# EAGLE board USBSolder (EAGLE 7.1.0)
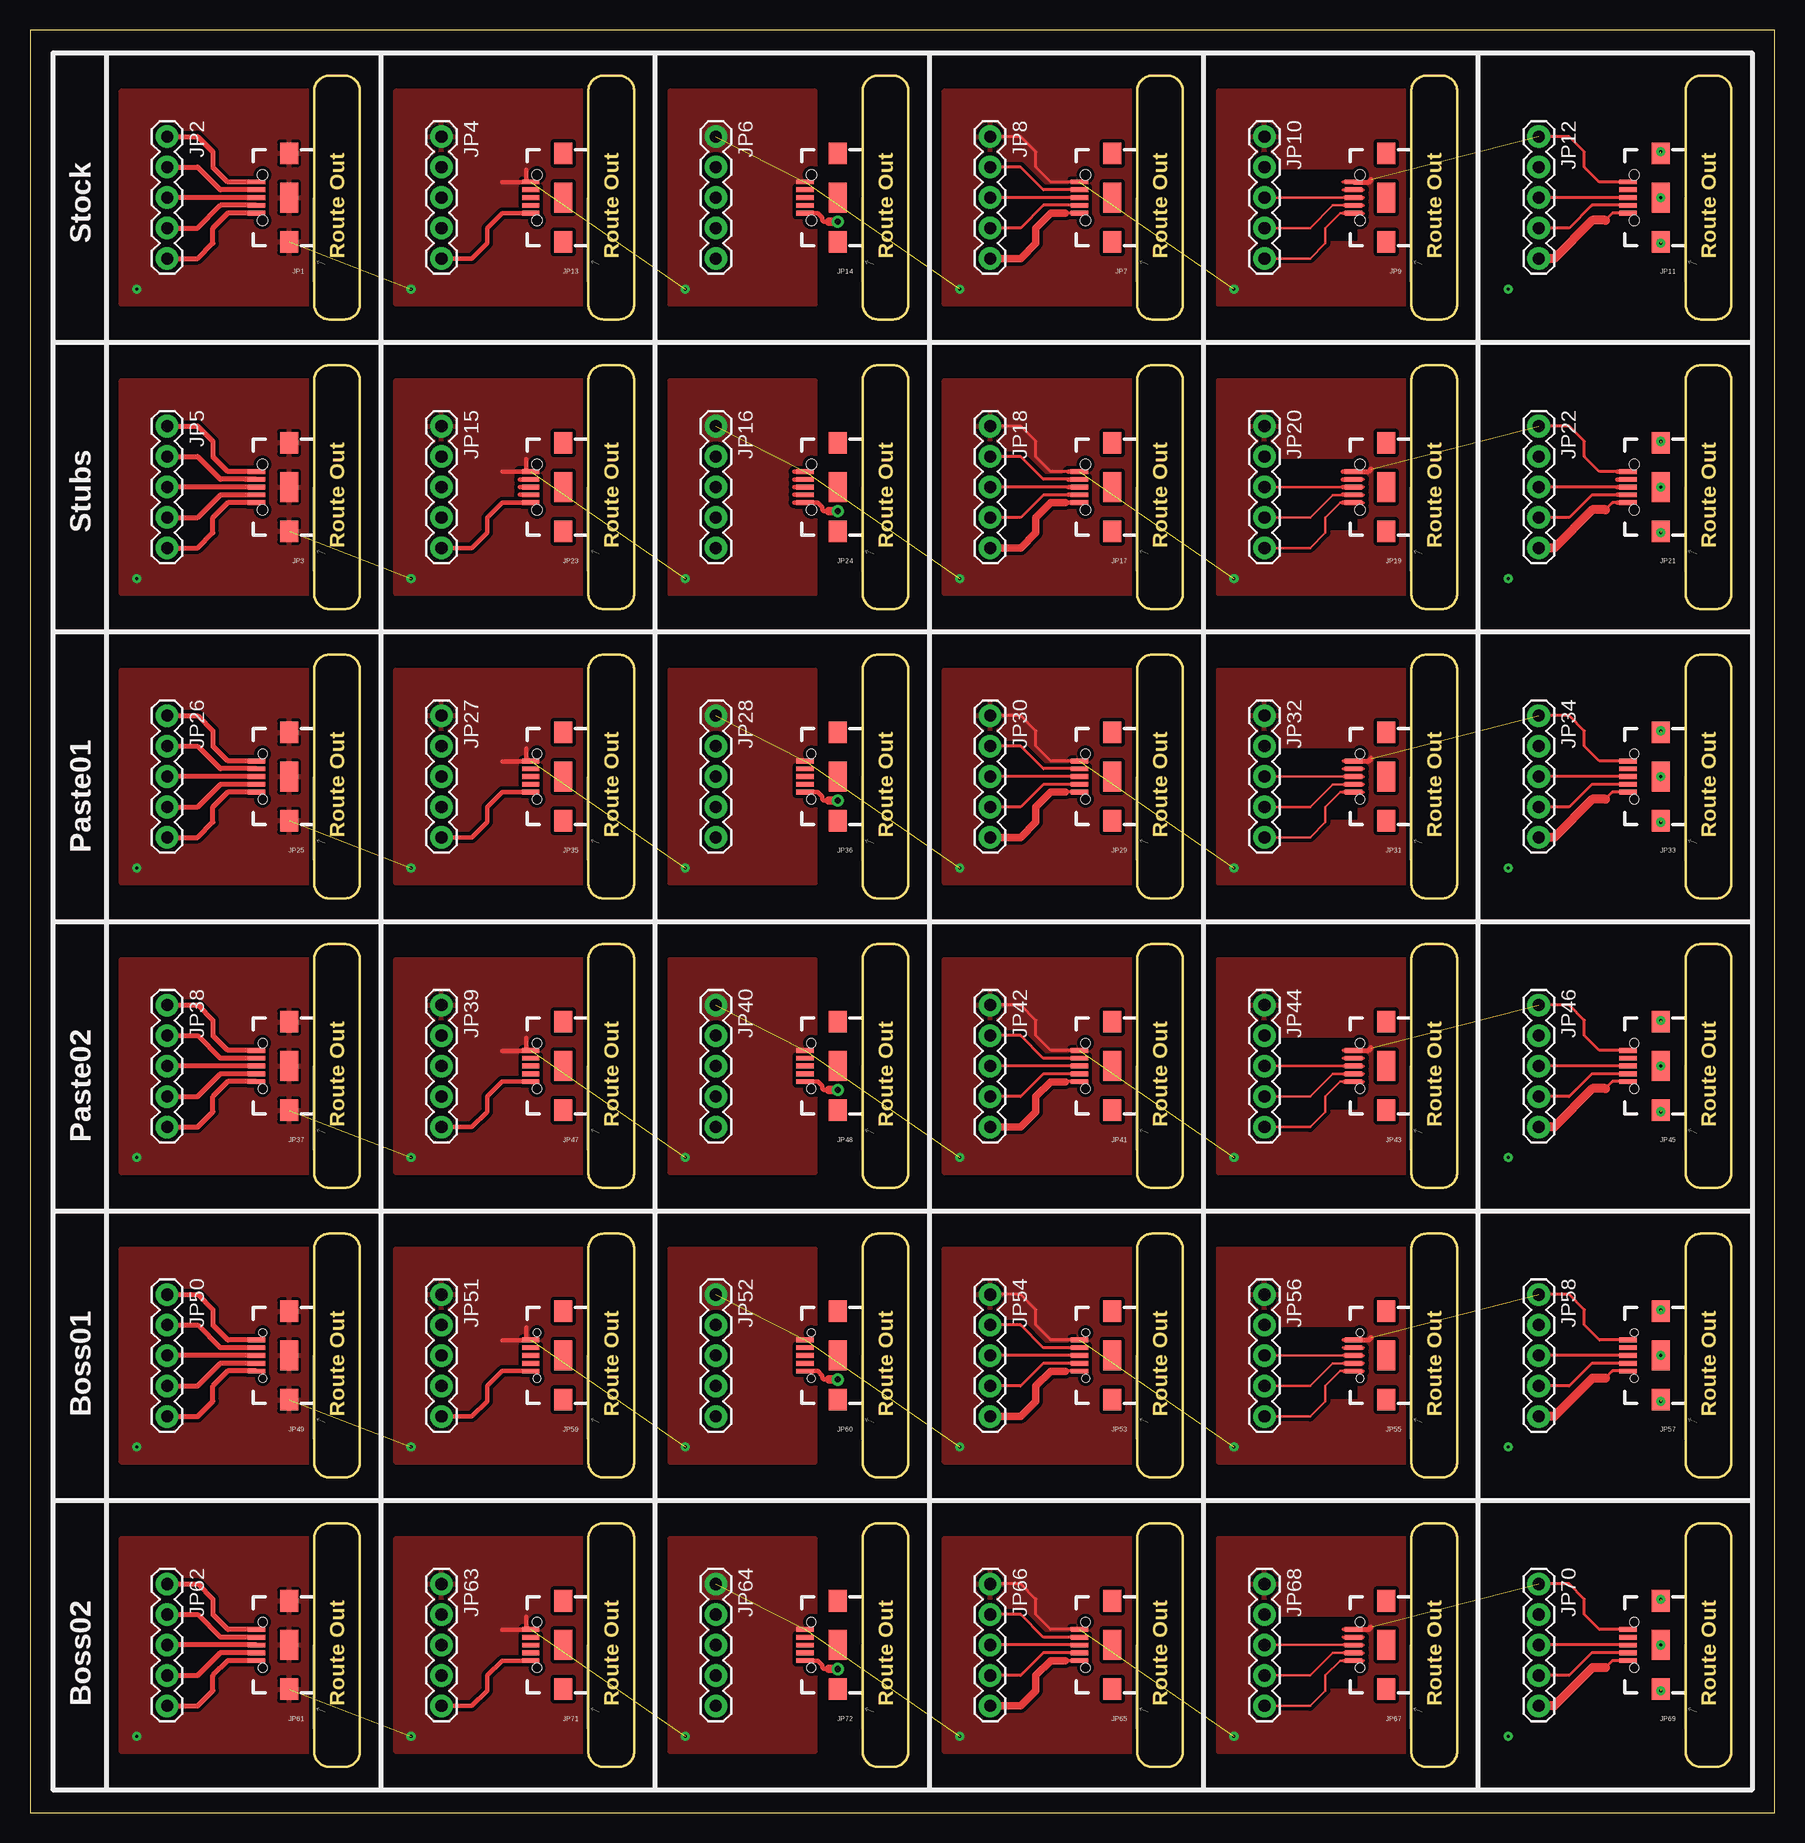
[diagram p0: board, top side]
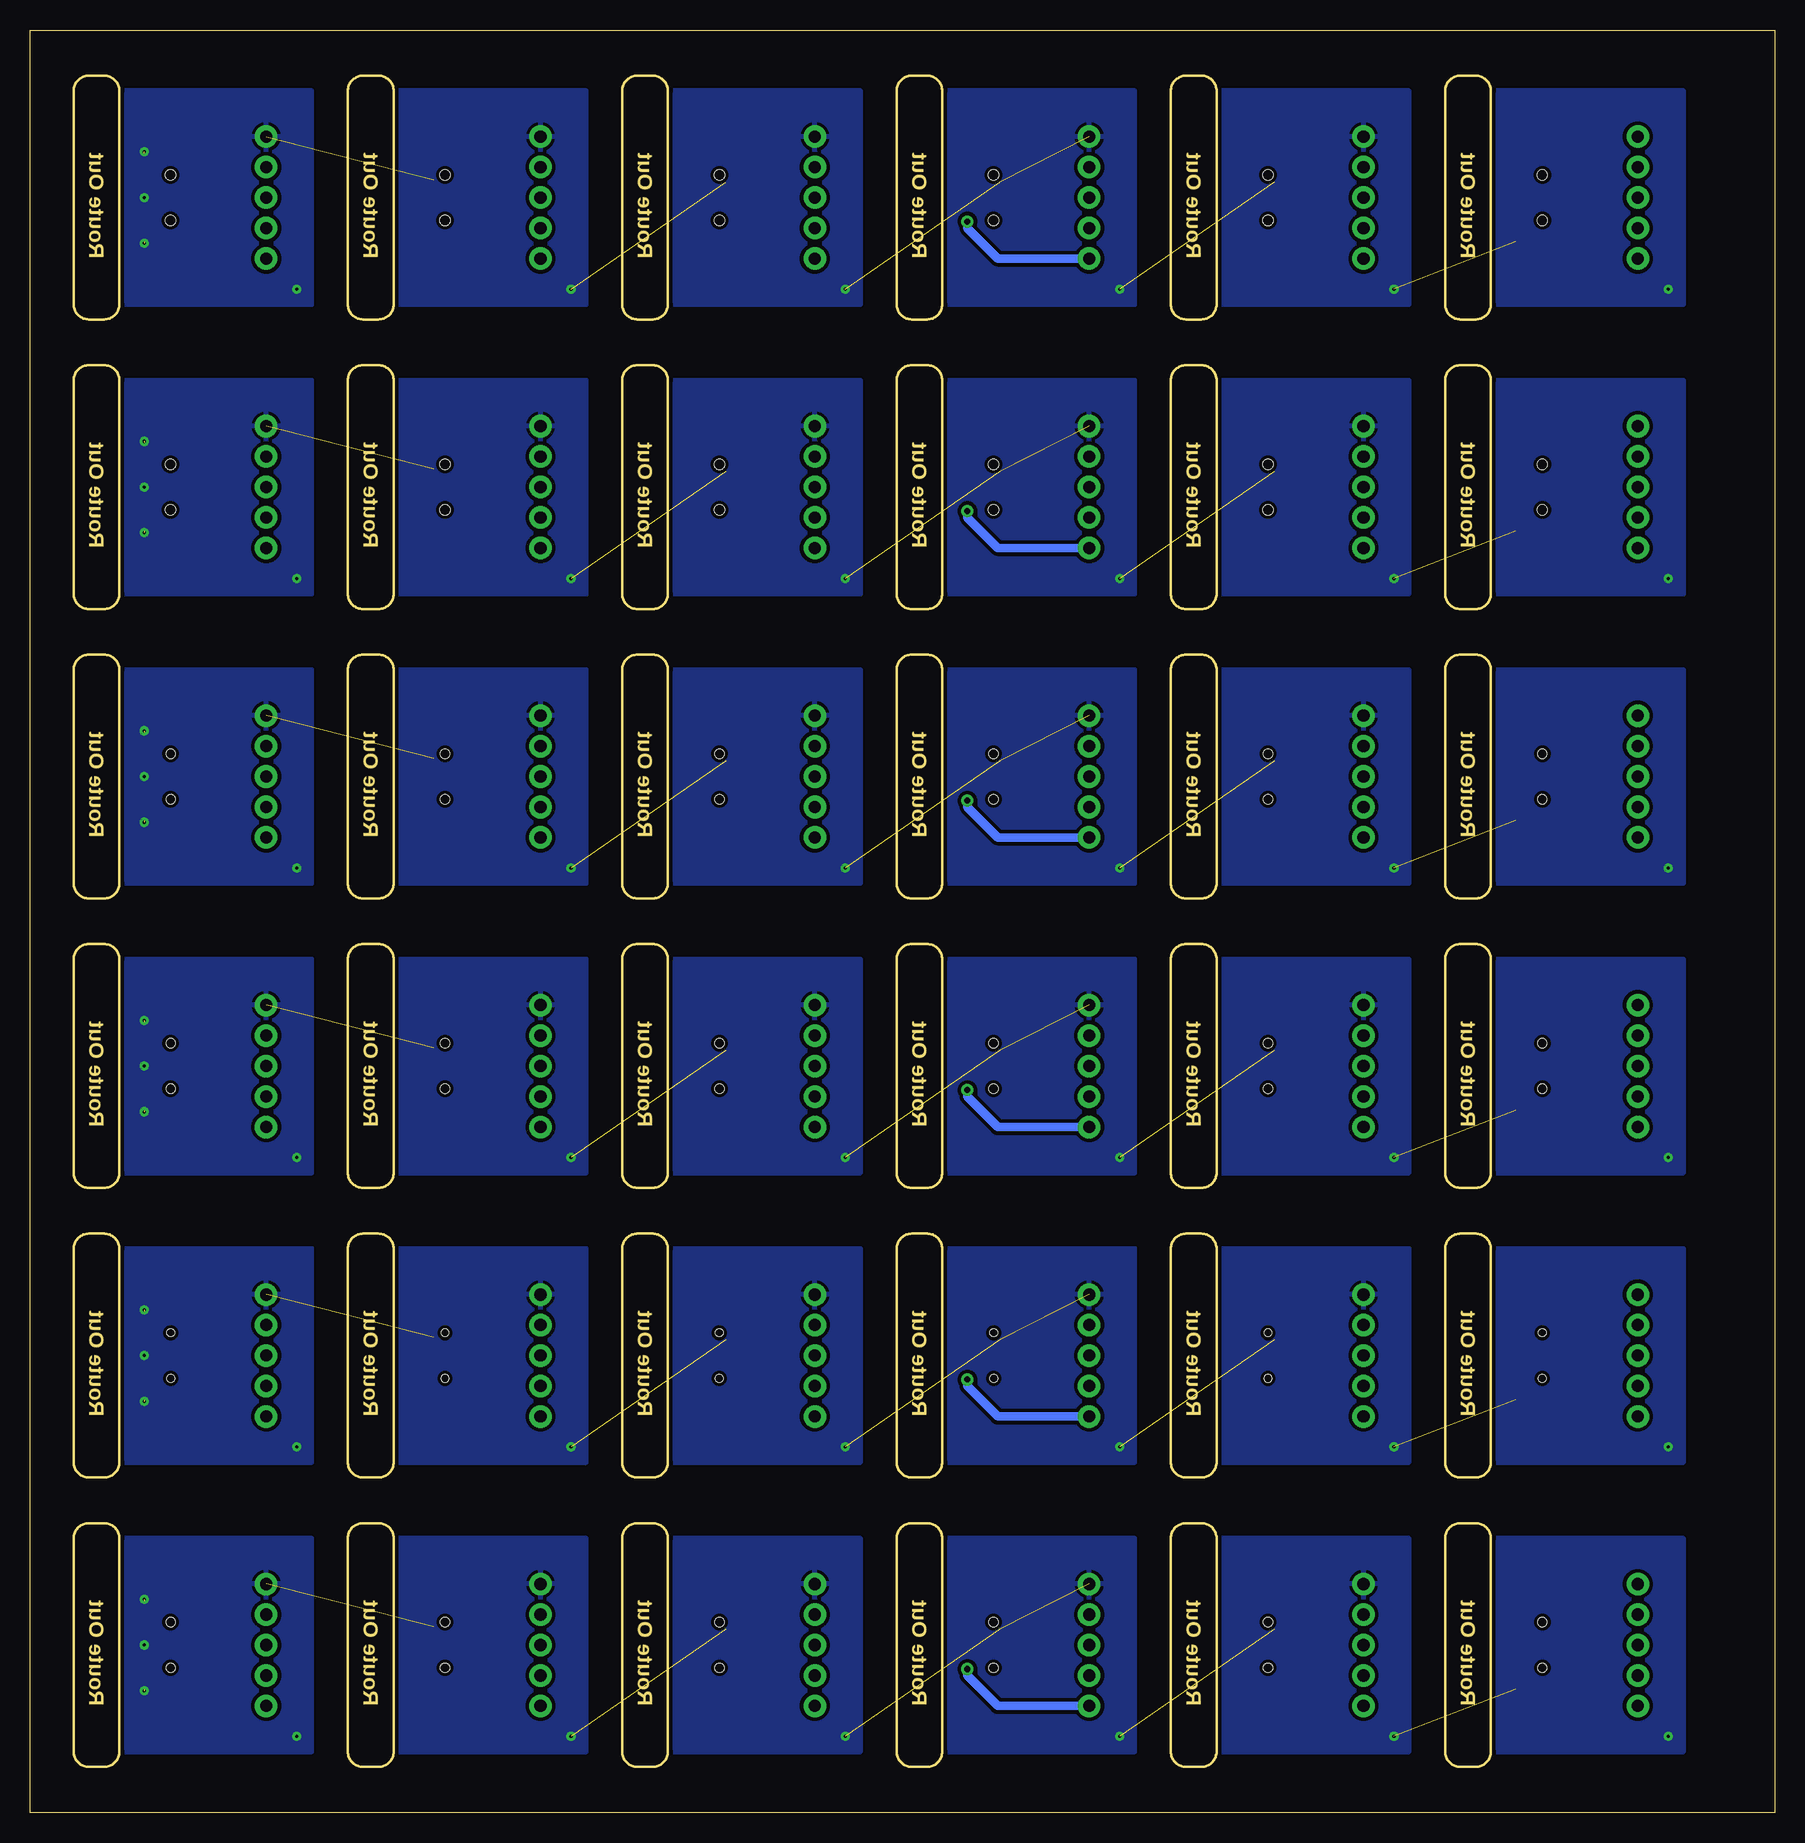
[diagram p1: board, bottom side, seen from below]

Size 145.41 x 148.59 mm. Coordinates in mm from the lower left corner, seen from the top.
Outline: 0,0 145.41,0 145.41,148.59 0,148.59 0,0
Outline: 23.67,125.73 23.67,143.51 arc-90 24.94,144.78 26.21,144.78 arc-90 27.48,143.51 27.48,125.73 arc-90 26.21,124.46 24.94,124.46 arc-90 23.67,125.73
Outline: 46.53,125.73 46.53,143.51 arc-90 47.8,144.78 49.07,144.78 arc-90 50.34,143.51 50.34,125.73 arc-90 49.07,124.46 47.8,124.46 arc-90 46.53,125.73
Outline: 69.39,125.73 69.39,143.51 arc-90 70.66,144.78 71.93,144.78 arc-90 73.2,143.51 73.2,125.73 arc-90 71.93,124.46 70.66,124.46 arc-90 69.39,125.73
Outline: 92.25,125.73 92.25,143.51 arc-90 93.52,144.78 94.79,144.78 arc-90 96.06,143.51 96.06,125.73 arc-90 94.79,124.46 93.52,124.46 arc-90 92.25,125.73
Outline: 115.11,125.73 115.11,143.51 arc-90 116.38,144.78 117.65,144.78 arc-90 118.92,143.51 118.92,125.73 arc-90 117.65,124.46 116.38,124.46 arc-90 115.11,125.73
Outline: 137.97,125.73 137.97,143.51 arc-90 139.24,144.78 140.51,144.78 arc-90 141.78,143.51 141.78,125.73 arc-90 140.51,124.46 139.24,124.46 arc-90 137.97,125.73
Outline: 23.67,101.6 23.67,119.38 arc-90 24.94,120.65 26.21,120.65 arc-90 27.48,119.38 27.48,101.6 arc-90 26.21,100.33 24.94,100.33 arc-90 23.67,101.6
Outline: 46.53,101.6 46.53,119.38 arc-90 47.8,120.65 49.07,120.65 arc-90 50.34,119.38 50.34,101.6 arc-90 49.07,100.33 47.8,100.33 arc-90 46.53,101.6
Outline: 69.39,101.6 69.39,119.38 arc-90 70.66,120.65 71.93,120.65 arc-90 73.2,119.38 73.2,101.6 arc-90 71.93,100.33 70.66,100.33 arc-90 69.39,101.6
Outline: 92.25,101.6 92.25,119.38 arc-90 93.52,120.65 94.79,120.65 arc-90 96.06,119.38 96.06,101.6 arc-90 94.79,100.33 93.52,100.33 arc-90 92.25,101.6
Outline: 115.11,101.6 115.11,119.38 arc-90 116.38,120.65 117.65,120.65 arc-90 118.92,119.38 118.92,101.6 arc-90 117.65,100.33 116.38,100.33 arc-90 115.11,101.6
Outline: 137.97,101.6 137.97,119.38 arc-90 139.24,120.65 140.51,120.65 arc-90 141.78,119.38 141.78,101.6 arc-90 140.51,100.33 139.24,100.33 arc-90 137.97,101.6
Outline: 23.67,77.47 23.67,95.25 arc-90 24.94,96.52 26.21,96.52 arc-90 27.48,95.25 27.48,77.47 arc-90 26.21,76.2 24.94,76.2 arc-90 23.67,77.47
Outline: 46.53,77.47 46.53,95.25 arc-90 47.8,96.52 49.07,96.52 arc-90 50.34,95.25 50.34,77.47 arc-90 49.07,76.2 47.8,76.2 arc-90 46.53,77.47
Outline: 69.39,77.47 69.39,95.25 arc-90 70.66,96.52 71.93,96.52 arc-90 73.2,95.25 73.2,77.47 arc-90 71.93,76.2 70.66,76.2 arc-90 69.39,77.47
Outline: 92.25,77.47 92.25,95.25 arc-90 93.52,96.52 94.79,96.52 arc-90 96.06,95.25 96.06,77.47 arc-90 94.79,76.2 93.52,76.2 arc-90 92.25,77.47
Outline: 115.11,77.47 115.11,95.25 arc-90 116.38,96.52 117.65,96.52 arc-90 118.92,95.25 118.92,77.47 arc-90 117.65,76.2 116.38,76.2 arc-90 115.11,77.47
Outline: 137.97,77.47 137.97,95.25 arc-90 139.24,96.52 140.51,96.52 arc-90 141.78,95.25 141.78,77.47 arc-90 140.51,76.2 139.24,76.2 arc-90 137.97,77.47
Outline: 23.67,53.34 23.67,71.12 arc-90 24.94,72.39 26.21,72.39 arc-90 27.48,71.12 27.48,53.34 arc-90 26.21,52.07 24.94,52.07 arc-90 23.67,53.34
Outline: 46.53,53.34 46.53,71.12 arc-90 47.8,72.39 49.07,72.39 arc-90 50.34,71.12 50.34,53.34 arc-90 49.07,52.07 47.8,52.07 arc-90 46.53,53.34
Outline: 69.39,53.34 69.39,71.12 arc-90 70.66,72.39 71.93,72.39 arc-90 73.2,71.12 73.2,53.34 arc-90 71.93,52.07 70.66,52.07 arc-90 69.39,53.34
Outline: 92.25,53.34 92.25,71.12 arc-90 93.52,72.39 94.79,72.39 arc-90 96.06,71.12 96.06,53.34 arc-90 94.79,52.07 93.52,52.07 arc-90 92.25,53.34
Outline: 115.11,53.34 115.11,71.12 arc-90 116.38,72.39 117.65,72.39 arc-90 118.92,71.12 118.92,53.34 arc-90 117.65,52.07 116.38,52.07 arc-90 115.11,53.34
Outline: 137.97,53.34 137.97,71.12 arc-90 139.24,72.39 140.51,72.39 arc-90 141.78,71.12 141.78,53.34 arc-90 140.51,52.07 139.24,52.07 arc-90 137.97,53.34
Outline: 23.67,29.21 23.67,46.99 arc-90 24.94,48.26 26.21,48.26 arc-90 27.48,46.99 27.48,29.21 arc-90 26.21,27.94 24.94,27.94 arc-90 23.67,29.21
Outline: 46.53,29.21 46.53,46.99 arc-90 47.8,48.26 49.07,48.26 arc-90 50.34,46.99 50.34,29.21 arc-90 49.07,27.94 47.8,27.94 arc-90 46.53,29.21
Outline: 69.39,29.21 69.39,46.99 arc-90 70.66,48.26 71.93,48.26 arc-90 73.2,46.99 73.2,29.21 arc-90 71.93,27.94 70.66,27.94 arc-90 69.39,29.21
Outline: 92.25,29.21 92.25,46.99 arc-90 93.52,48.26 94.79,48.26 arc-90 96.06,46.99 96.06,29.21 arc-90 94.79,27.94 93.52,27.94 arc-90 92.25,29.21
Outline: 115.11,29.21 115.11,46.99 arc-90 116.38,48.26 117.65,48.26 arc-90 118.92,46.99 118.92,29.21 arc-90 117.65,27.94 116.38,27.94 arc-90 115.11,29.21
Outline: 137.97,29.21 137.97,46.99 arc-90 139.24,48.26 140.51,48.26 arc-90 141.78,46.99 141.78,29.21 arc-90 140.51,27.94 139.24,27.94 arc-90 137.97,29.21
Outline: 23.67,5.08 23.67,22.86 arc-90 24.94,24.13 26.21,24.13 arc-90 27.48,22.86 27.48,5.08 arc-90 26.21,3.81 24.94,3.81 arc-90 23.67,5.08
Outline: 46.53,5.08 46.53,22.86 arc-90 47.8,24.13 49.07,24.13 arc-90 50.34,22.86 50.34,5.08 arc-90 49.07,3.81 47.8,3.81 arc-90 46.53,5.08
Outline: 69.39,5.08 69.39,22.86 arc-90 70.66,24.13 71.93,24.13 arc-90 73.2,22.86 73.2,5.08 arc-90 71.93,3.81 70.66,3.81 arc-90 69.39,5.08
Outline: 92.25,5.08 92.25,22.86 arc-90 93.52,24.13 94.79,24.13 arc-90 96.06,22.86 96.06,5.08 arc-90 94.79,3.81 93.52,3.81 arc-90 92.25,5.08
Outline: 115.11,5.08 115.11,22.86 arc-90 116.38,24.13 117.65,24.13 arc-90 118.92,22.86 118.92,5.08 arc-90 117.65,3.81 116.38,3.81 arc-90 115.11,5.08
Outline: 137.97,5.08 137.97,22.86 arc-90 139.24,24.13 140.51,24.13 arc-90 141.78,22.86 141.78,5.08 arc-90 140.51,3.81 139.24,3.81 arc-90 137.97,5.08
Copper layers (1*16): Top 0.035mm / dielectric 1.5mm / Bottom 0.035mm
Design rules "SparkFun-2-layer": minimum track width 7mil, minimum drill 15mil, track to track 8mil, track to pad 8mil, pad to pad 8mil, via to via 8mil, smd to smd 8mil, copper to edge 8mil, drill to drill 8mil, minimum pad ring 12mil, minimum via ring 10mil, stop-mask expansion 4mil, vias tented up to drill 20mil, thermal gap 10mil

## Footprints (pad centres in the part's own frame; a part is rotated, then mirrored left to right if it is on the bottom)
USB-B-MICRO-SMD_V03 = smd 1.45 x 0.4: D+1 2.725,0; D-1 2.725,0.65; GND1 2.725,-1.3; ID1 2.725,-0.65; VBUS1 2.725,1.3 | smd 1.5 x 1.8: SHIELD1 0,3.685; SHIELD2 0,-3.685 | smd 1.5 x 2.5: SHIELD3 0,0 | hole 0.85: 2.2,1.9; 2.2,-1.9
1X05 = drill 1.016 pad 1.88: 1 0,0; 2 2.54,0; 3 5.08,0; 4 7.62,0; 5 10.16,0
USB-MICRO-STUBS-01 = smd 1.45 x 0.4: D+1 2.725,0; D-1 2.725,0.65; GND1 2.725,-1.3; ID1 2.725,-0.65; VBUS1 2.725,1.3 | smd 1.5 x 1.8: SHIELD1 0,3.685; SHIELD2 0,-3.685 | smd 1.5 x 2.5: SHIELD3 0,0 | hole 0.85: 2.2,1.9; 2.2,-1.9
USB-MICRO-PASTE-01 = smd 1.45 x 0.4: D+1 2.725,0; D-1 2.725,0.65; GND1 2.725,-1.3; ID1 2.725,-0.65; VBUS1 2.725,1.3 | smd 1.5 x 1.8: SHIELD1 0,3.685; SHIELD2 0,-3.685 | smd 1.5 x 2.5: SHIELD3 0,0 | hole 0.762: 2.2,1.9; 2.2,-1.9
USB-MICRO-PASTE-02 = smd 1.45 x 0.4: D+1 2.725,0; D-1 2.725,0.65; GND1 2.725,-1.3; ID1 2.725,-0.65; VBUS1 2.725,1.3 | smd 1.5 x 1.8: SHIELD1 0,3.685; SHIELD2 0,-3.685 | smd 1.5 x 2.5: SHIELD3 0,0 | hole 0.762: 2.2,1.9; 2.2,-1.9
USB-MICRO-BOSS-01 = smd 1.45 x 0.4: D+1 2.725,0; D-1 2.725,0.65; GND1 2.725,-1.3; ID1 2.725,-0.65; VBUS1 2.725,1.3 | smd 1.5 x 1.8: SHIELD1 0,3.685; SHIELD2 0,-3.685 | smd 1.5 x 2.5: SHIELD3 0,0 | hole 0.635: 2.2,1.9; 2.2,-1.9
USB-MICRO-BOSS-02 = smd 1.45 x 0.4: D+1 2.725,0; D-1 2.725,0.65; GND1 2.725,-1.3; ID1 2.725,-0.65; VBUS1 2.725,1.3 | smd 1.5 x 1.8: SHIELD1 0,3.685; SHIELD2 0,-3.685 | smd 1.5 x 2.5: SHIELD3 0,0 | hole 0.762: 2.2,1.9; 2.2,-1.9

## Placement (x,y rotation side)
FRAME1  FRAME-LETTER  [CREATIVE_COMMONS]  48.26,-17.78 0 top  (outside the outline)
JP1  [USB-B-MICRO-SMD_V03]  21.59,134.62 180 top
JP2  [1X05]  11.43,139.7 270 top
JP3  [USB-MICRO-STUBS-01]  21.59,110.49 180 top
JP4  [1X05]  34.29,139.7 270 top
JP5  [1X05]  11.43,115.57 270 top
JP6  [1X05]  57.15,139.7 270 top
JP7  [USB-B-MICRO-SMD_V03]  90.17,134.62 180 top
JP8  [1X05]  80.01,139.7 270 top
JP9  [USB-B-MICRO-SMD_V03]  113.03,134.62 180 top
JP10  [1X05]  102.87,139.7 270 top
JP11  [USB-B-MICRO-SMD_V03]  135.89,134.62 180 top
JP12  [1X05]  125.73,139.7 270 top
JP13  [USB-B-MICRO-SMD_V03]  44.45,134.62 180 top
JP14  [USB-B-MICRO-SMD_V03]  67.31,134.62 180 top
JP15  [1X05]  34.29,115.57 270 top
JP16  [1X05]  57.15,115.57 270 top
JP17  [USB-MICRO-STUBS-01]  90.17,110.49 180 top
JP18  [1X05]  80.01,115.57 270 top
JP19  [USB-MICRO-STUBS-01]  113.03,110.49 180 top
JP20  [1X05]  102.87,115.57 270 top
JP21  [USB-MICRO-STUBS-01]  135.89,110.49 180 top
JP22  [1X05]  125.73,115.57 270 top
JP23  [USB-MICRO-STUBS-01]  44.45,110.49 180 top
JP24  [USB-MICRO-STUBS-01]  67.31,110.49 180 top
JP25  [USB-MICRO-PASTE-01]  21.59,86.36 180 top
JP26  [1X05]  11.43,91.44 270 top
JP27  [1X05]  34.29,91.44 270 top
JP28  [1X05]  57.15,91.44 270 top
JP29  [USB-MICRO-PASTE-01]  90.17,86.36 180 top
JP30  [1X05]  80.01,91.44 270 top
JP31  [USB-MICRO-PASTE-01]  113.03,86.36 180 top
JP32  [1X05]  102.87,91.44 270 top
JP33  [USB-MICRO-PASTE-01]  135.89,86.36 180 top
JP34  [1X05]  125.73,91.44 270 top
JP35  [USB-MICRO-PASTE-01]  44.45,86.36 180 top
JP36  [USB-MICRO-PASTE-01]  67.31,86.36 180 top
JP37  [USB-MICRO-PASTE-02]  21.59,62.23 180 top
JP38  [1X05]  11.43,67.31 270 top
JP39  [1X05]  34.29,67.31 270 top
JP40  [1X05]  57.15,67.31 270 top
JP41  [USB-MICRO-PASTE-02]  90.17,62.23 180 top
JP42  [1X05]  80.01,67.31 270 top
JP43  [USB-MICRO-PASTE-02]  113.03,62.23 180 top
JP44  [1X05]  102.87,67.31 270 top
JP45  [USB-MICRO-PASTE-02]  135.89,62.23 180 top
JP46  [1X05]  125.73,67.31 270 top
JP47  [USB-MICRO-PASTE-02]  44.45,62.23 180 top
JP48  [USB-MICRO-PASTE-02]  67.31,62.23 180 top
JP49  [USB-MICRO-BOSS-01]  21.59,38.1 180 top
JP50  [1X05]  11.43,43.18 270 top
JP51  [1X05]  34.29,43.18 270 top
JP52  [1X05]  57.15,43.18 270 top
JP53  [USB-MICRO-BOSS-01]  90.17,38.1 180 top
JP54  [1X05]  80.01,43.18 270 top
JP55  [USB-MICRO-BOSS-01]  113.03,38.1 180 top
JP56  [1X05]  102.87,43.18 270 top
JP57  [USB-MICRO-BOSS-01]  135.89,38.1 180 top
JP58  [1X05]  125.73,43.18 270 top
JP59  [USB-MICRO-BOSS-01]  44.45,38.1 180 top
JP60  [USB-MICRO-BOSS-01]  67.31,38.1 180 top
JP61  [USB-MICRO-BOSS-02]  21.59,13.97 180 top
JP62  [1X05]  11.43,19.05 270 top
JP63  [1X05]  34.29,19.05 270 top
JP64  [1X05]  57.15,19.05 270 top
JP65  [USB-MICRO-BOSS-02]  90.17,13.97 180 top
JP66  [1X05]  80.01,19.05 270 top
JP67  [USB-MICRO-BOSS-02]  113.03,13.97 180 top
JP68  [1X05]  102.87,19.05 270 top
JP69  [USB-MICRO-BOSS-02]  135.89,13.97 180 top
JP70  [1X05]  125.73,19.05 270 top
JP71  [USB-MICRO-BOSS-02]  44.45,13.97 180 top
JP72  [USB-MICRO-BOSS-02]  67.31,13.97 180 top

## Library data of the parts
FRAME1 = SparkFun-Aesthetics
JP1 JP3 JP7 JP9 JP11 JP13 JP14 JP17 JP19 JP21 JP23-JP25 JP29 JP31 JP33 JP35-JP37 JP41 JP43 JP45 JP47-JP49 JP53 JP55 JP57 JP59-JP61 JP65 JP67 JP69 JP71 JP72 = TestUSBs; PROD_ID: CONN-11752
JP2 JP4-JP6 JP8 JP10 JP12 JP15 JP16 JP18 JP20 JP22 JP26-JP28 JP30 JP32 JP34 JP38-JP40 JP42 JP44 JP46 JP50-JP52 JP54 JP56 JP58 JP62-JP64 JP66 JP68 JP70 = SparkFun-Connectors

## Nets
5V1: JP6.5 JP14.VBUS1
5V2: JP16.5 JP24.VBUS1
5V3: JP28.5 JP36.VBUS1
5V4: JP40.5 JP48.VBUS1
5V5: JP52.5 JP60.VBUS1
5V6: JP64.5 JP72.VBUS1
GND: JP1.SHIELD1 JP1.SHIELD2 JP1.SHIELD3 JP4.1 JP6.1 JP7.GND1 JP8.1 JP9.GND1 JP10.1 JP11.GND1 JP11.SHIELD1 JP11.SHIELD2 JP11.SHIELD3 JP12.1 JP13.GND1 JP14.GND1
GND1: JP3.SHIELD1 JP3.SHIELD2 JP3.SHIELD3 JP15.1 JP16.1 JP17.GND1 JP18.1 JP19.GND1 JP20.1 JP21.GND1 JP21.SHIELD1 JP21.SHIELD2 JP21.SHIELD3 JP22.1 JP23.GND1 JP24.GND1
GND2: JP25.SHIELD1 JP25.SHIELD2 JP25.SHIELD3 JP27.1 JP28.1 JP29.GND1 JP30.1 JP31.GND1 JP32.1 JP33.GND1 JP33.SHIELD1 JP33.SHIELD2 JP33.SHIELD3 JP34.1 JP35.GND1 JP36.GND1
GND3: JP37.SHIELD1 JP37.SHIELD2 JP37.SHIELD3 JP39.1 JP40.1 JP41.GND1 JP42.1 JP43.GND1 JP44.1 JP45.GND1 JP45.SHIELD1 JP45.SHIELD2 JP45.SHIELD3 JP46.1 JP47.GND1 JP48.GND1
GND4: JP49.SHIELD1 JP49.SHIELD2 JP49.SHIELD3 JP51.1 JP52.1 JP53.GND1 JP54.1 JP55.GND1 JP56.1 JP57.GND1 JP57.SHIELD1 JP57.SHIELD2 JP57.SHIELD3 JP58.1 JP59.GND1 JP60.GND1
GND5: JP61.SHIELD1 JP61.SHIELD2 JP61.SHIELD3 JP63.1 JP64.1 JP65.GND1 JP66.1 JP67.GND1 JP68.1 JP69.GND1 JP69.SHIELD1 JP69.SHIELD2 JP69.SHIELD3 JP70.1 JP71.GND1 JP72.GND1
N$1: JP1.GND1 JP2.1
N$2: JP1.ID1 JP2.2
N$3: JP1.D+1 JP2.3
N$4: JP1.D-1 JP2.4
N$5: JP1.VBUS1 JP2.5
N$7: JP3.GND1 JP5.1
N$8: JP3.ID1 JP5.2
N$9: JP7.ID1 JP8.2
N$10: JP4.5 JP13.VBUS1
N$11: JP7.D+1 JP8.3
N$12: JP7.D-1 JP8.4
N$13: JP7.VBUS1 JP8.5
N$14: JP3.D+1 JP5.3
N$15: JP3.D-1 JP5.4
N$16: JP9.D+1 JP10.3
N$17: JP9.D-1 JP10.4
N$18: JP9.VBUS1 JP10.5
N$19: JP3.VBUS1 JP5.5
N$20: JP15.5 JP23.VBUS1
N$21: JP11.D+1 JP12.3
N$22: JP11.D-1 JP12.4
N$23: JP11.VBUS1 JP12.5
N$24: JP17.ID1 JP18.2
N$25: JP17.D+1 JP18.3
N$26: JP17.D-1 JP18.4
N$27: JP17.VBUS1 JP18.5
N$28: JP19.D+1 JP20.3
N$29: JP19.D-1 JP20.4
N$30: JP19.VBUS1 JP20.5
N$31: JP21.D+1 JP22.3
N$32: JP21.D-1 JP22.4
N$33: JP21.VBUS1 JP22.5
N$35: JP25.GND1 JP26.1
N$36: JP25.ID1 JP26.2
N$37: JP25.D+1 JP26.3
N$38: JP25.D-1 JP26.4
N$39: JP25.VBUS1 JP26.5
N$40: JP27.5 JP35.VBUS1
N$41: JP29.ID1 JP30.2
N$42: JP29.D+1 JP30.3
N$43: JP29.D-1 JP30.4
N$44: JP29.VBUS1 JP30.5
N$45: JP31.D+1 JP32.3
N$46: JP31.D-1 JP32.4
N$47: JP31.VBUS1 JP32.5
N$48: JP33.D+1 JP34.3
N$49: JP33.D-1 JP34.4
N$50: JP33.VBUS1 JP34.5
N$52: JP37.GND1 JP38.1
N$53: JP37.ID1 JP38.2
N$54: JP37.D+1 JP38.3
N$55: JP37.D-1 JP38.4
N$56: JP37.VBUS1 JP38.5
N$57: JP39.5 JP47.VBUS1
N$58: JP41.ID1 JP42.2
N$59: JP41.D+1 JP42.3
N$60: JP41.D-1 JP42.4
N$61: JP41.VBUS1 JP42.5
N$62: JP43.D+1 JP44.3
N$63: JP43.D-1 JP44.4
N$64: JP43.VBUS1 JP44.5
N$65: JP45.D+1 JP46.3
N$66: JP45.D-1 JP46.4
N$67: JP45.VBUS1 JP46.5
N$69: JP49.GND1 JP50.1
N$70: JP49.ID1 JP50.2
N$71: JP49.D+1 JP50.3
N$72: JP49.D-1 JP50.4
N$73: JP49.VBUS1 JP50.5
N$74: JP51.5 JP59.VBUS1
N$75: JP53.ID1 JP54.2
N$76: JP53.D+1 JP54.3
N$77: JP53.D-1 JP54.4
N$78: JP53.VBUS1 JP54.5
N$79: JP55.D+1 JP56.3
N$80: JP55.D-1 JP56.4
N$81: JP55.VBUS1 JP56.5
N$82: JP57.D+1 JP58.3
N$83: JP57.D-1 JP58.4
N$84: JP57.VBUS1 JP58.5
N$86: JP61.GND1 JP62.1
N$87: JP61.ID1 JP62.2
N$88: JP61.D+1 JP62.3
N$89: JP61.D-1 JP62.4
N$90: JP61.VBUS1 JP62.5
N$91: JP63.5 JP71.VBUS1
N$92: JP65.ID1 JP66.2
N$93: JP65.D+1 JP66.3
N$94: JP65.D-1 JP66.4
N$95: JP65.VBUS1 JP66.5
N$96: JP67.D+1 JP68.3
N$97: JP67.D-1 JP68.4
N$98: JP67.VBUS1 JP68.5
N$99: JP69.D+1 JP70.3
N$100: JP69.D-1 JP70.4
N$101: JP69.VBUS1 JP70.5

## Tracks (layer width: path | path; a pad name or v marks a point on that pad's centre or on a via)
5V1  (via drill 0.51)
  Top 0.356: 66.58,132.62 66.16,132.62 66.02,132.75 66.02,132.94 65.64,133.32 JP14.VBUS1
  Top 0.711: 66.58,132.62 v67.31,132.62
  Bottom 0.711: v67.31,132.62 67.31,132.08 64.77,129.54 JP6.5
5V2  (via drill 0.51)
  Top 0.356: 66.58,108.49 66.16,108.49 66.02,108.62 66.02,108.81 65.64,109.19 JP24.VBUS1
  Top 0.711: 66.58,108.49 v67.31,108.49
  Bottom 0.711: v67.31,108.49 67.31,107.95 64.77,105.41 JP16.5
5V3  (via drill 0.51)
  Top 0.356: 66.58,84.36 66.16,84.36 66.02,84.5 66.02,84.68 65.64,85.06 JP36.VBUS1
  Top 0.711: 66.58,84.36 v67.31,84.36
  Bottom 0.711: v67.31,84.36 67.31,83.82 64.77,81.28 JP28.5
5V4  (via drill 0.51)
  Top 0.356: 66.58,60.23 66.16,60.23 66.02,60.37 66.02,60.55 65.64,60.93 JP48.VBUS1
  Top 0.711: 66.58,60.23 v67.31,60.23
  Bottom 0.711: v67.31,60.23 67.31,59.69 64.77,57.15 JP40.5
5V5  (via drill 0.51)
  Top 0.356: 66.58,36.1 66.16,36.1 66.02,36.23 66.02,36.42 65.64,36.8 JP60.VBUS1
  Top 0.711: 66.58,36.1 v67.31,36.1
  Bottom 0.711: v67.31,36.1 67.31,35.56 64.77,33.02 JP52.5
5V6  (via drill 0.51)
  Top 0.356: 66.58,11.97 66.16,11.97 66.02,12.11 66.02,12.29 65.64,12.67 JP72.VBUS1
  Top 0.711: 66.58,11.97 v67.31,11.97
  Bottom 0.711: v67.31,11.97 67.31,11.43 64.77,8.89 JP64.5
GND  (via drill 0.25)  (8 unrouted)
  Top 0.254: JP7.GND1 85.06,135.92 83.82,137.16 83.82,138.43 82.55,139.7 JP8.1 | 109.42,135.93 109.43,135.92 JP9.GND1 109.41,135.92 109.4,135.93 111.2,135.93 | JP11.GND1 130.78,135.92 129.54,137.16 129.54,138.43 128.27,139.7 JP12.1
  Top 0.356: JP13.GND1 41.7,135.89 41.34,135.89 | 41.34,135.89 39.37,135.89 | 41.34,135.89 41.34,136.96
  Top 0.406: JP9.GND1 111.55,135.92 111.76,136.13
  other vias: 135.89,134.62 135.89,138.43 135.89,130.81 100.33,127 77.47,127 54.61,127 31.75,127 8.89,127 123.19,127
  pour Top (isolate 0.305): 7.62,143.51 27.94,143.51 27.94,125.73 7.62,125.73
  pour Top (isolate 0.305): 30.48,143.51 50.8,143.51 50.8,125.73 30.48,125.73
  pour Top (isolate 0.305, no thermals): 53.34,143.51 65.41,143.51 65.41,125.73 53.34,125.73
  pour Top (isolate 0.305): 76.2,143.51 96.52,143.51 96.52,125.73 76.2,125.73
  pour Top (isolate 0.305): 99.06,143.51 119.38,143.51 119.38,125.73 110.85,125.73 110.85,137.16 102.87,137.16 102.87,125.73 99.06,125.73
  pour Top (isolate 0.305): 106.68,129.54 107.95,130.81 110.97,130.81 110.97,125.73 102.87,125.73 102.87,129.54
  pour Bottom (isolate 0.305): 121.92,143.51 142.24,143.51 142.24,125.73 121.92,125.73
  pour Bottom (isolate 0.305): 99.06,143.51 119.38,143.51 119.38,125.73 99.06,125.73
  pour Bottom (isolate 0.305): 76.2,143.51 96.52,143.51 96.52,125.73 76.2,125.73
  pour Bottom (isolate 0.305): 53.34,143.51 73.66,143.51 73.66,125.73 53.34,125.73
  pour Bottom (isolate 0.305): 30.48,143.51 50.8,143.51 50.8,125.73 30.48,125.73
  pour Bottom (isolate 0.305): 7.62,143.51 27.94,143.51 27.94,125.73 7.62,125.73
GND1  (via drill 0.25)  (8 unrouted)
  Top 0.254: JP17.GND1 85.06,111.79 83.82,113.03 83.82,114.3 82.55,115.57 JP18.1 | 109.42,111.8 109.43,111.79 JP19.GND1 109.41,111.79 109.4,111.8 111.2,111.8 | JP21.GND1 130.78,111.79 129.54,113.03 129.54,114.3 128.27,115.57 JP22.1
  Top 0.356: JP23.GND1 41.7,111.76 41.34,111.76 | 41.34,111.76 39.37,111.76 | 41.34,111.76 41.34,112.83
  Top 0.406: JP19.GND1 111.55,111.79 111.76,112
  other vias: 135.89,110.49 135.89,114.3 135.89,106.68 100.33,102.87 77.47,102.87 54.61,102.87 31.75,102.87 8.89,102.87 123.19,102.87
  pour Top (isolate 0.305): 7.62,119.38 27.94,119.38 27.94,101.6 7.62,101.6
  pour Top (isolate 0.305): 30.48,119.38 50.8,119.38 50.8,101.6 30.48,101.6
  pour Top (isolate 0.305, no thermals): 53.34,119.38 65.41,119.38 65.41,101.6 53.34,101.6
  pour Top (isolate 0.305): 76.2,119.38 96.52,119.38 96.52,101.6 76.2,101.6
  pour Top (isolate 0.305): 99.06,119.38 119.38,119.38 119.38,101.6 110.85,101.6 110.85,113.03 102.87,113.03 102.87,101.6 99.06,101.6
  pour Top (isolate 0.305): 106.68,105.41 107.95,106.68 110.97,106.68 110.97,101.6 102.87,101.6 102.87,105.41
  pour Bottom (isolate 0.305): 121.92,119.38 142.24,119.38 142.24,101.6 121.92,101.6
  pour Bottom (isolate 0.305): 99.06,119.38 119.38,119.38 119.38,101.6 99.06,101.6
  pour Bottom (isolate 0.305): 76.2,119.38 96.52,119.38 96.52,101.6 76.2,101.6
  pour Bottom (isolate 0.305): 53.34,119.38 73.66,119.38 73.66,101.6 53.34,101.6
  pour Bottom (isolate 0.305): 30.48,119.38 50.8,119.38 50.8,101.6 30.48,101.6
  pour Bottom (isolate 0.305): 7.62,119.38 27.94,119.38 27.94,101.6 7.62,101.6
GND2  (via drill 0.25)  (8 unrouted)
  Top 0.254: JP29.GND1 85.06,87.66 83.82,88.9 83.82,90.17 82.55,91.44 JP30.1 | 109.42,87.67 109.43,87.66 JP31.GND1 109.41,87.66 109.4,87.67 111.2,87.67 | JP33.GND1 130.78,87.66 129.54,88.9 129.54,90.17 128.27,91.44 JP34.1
  Top 0.356: JP35.GND1 41.7,87.63 41.34,87.63 | 41.34,87.63 39.37,87.63 | 41.34,87.63 41.34,88.7
  Top 0.406: JP31.GND1 111.55,87.66 111.76,87.87
  other vias: 135.89,86.36 135.89,90.17 135.89,82.55 100.33,78.74 77.47,78.74 54.61,78.74 31.75,78.74 8.89,78.74 123.19,78.74
  pour Top (isolate 0.305): 7.62,95.25 27.94,95.25 27.94,77.47 7.62,77.47
  pour Top (isolate 0.305): 30.48,95.25 50.8,95.25 50.8,77.47 30.48,77.47
  pour Top (isolate 0.305, no thermals): 53.34,95.25 65.41,95.25 65.41,77.47 53.34,77.47
  pour Top (isolate 0.305): 76.2,95.25 96.52,95.25 96.52,77.47 76.2,77.47
  pour Top (isolate 0.305): 99.06,95.25 119.38,95.25 119.38,77.47 110.85,77.47 110.85,88.9 102.87,88.9 102.87,77.47 99.06,77.47
  pour Top (isolate 0.305): 106.68,81.28 107.95,82.55 110.97,82.55 110.97,77.47 102.87,77.47 102.87,81.28
  pour Bottom (isolate 0.305): 121.92,95.25 142.24,95.25 142.24,77.47 121.92,77.47
  pour Bottom (isolate 0.305): 99.06,95.25 119.38,95.25 119.38,77.47 99.06,77.47
  pour Bottom (isolate 0.305): 76.2,95.25 96.52,95.25 96.52,77.47 76.2,77.47
  pour Bottom (isolate 0.305): 53.34,95.25 73.66,95.25 73.66,77.47 53.34,77.47
  pour Bottom (isolate 0.305): 30.48,95.25 50.8,95.25 50.8,77.47 30.48,77.47
  pour Bottom (isolate 0.305): 7.62,95.25 27.94,95.25 27.94,77.47 7.62,77.47
GND3  (via drill 0.25)  (8 unrouted)
  Top 0.254: JP41.GND1 85.06,63.53 83.82,64.77 83.82,66.04 82.55,67.31 JP42.1 | 109.42,63.54 109.43,63.53 JP43.GND1 109.41,63.53 109.4,63.54 111.2,63.54 | JP45.GND1 130.78,63.53 129.54,64.77 129.54,66.04 128.27,67.31 JP46.1
  Top 0.356: JP47.GND1 41.7,63.5 41.34,63.5 | 41.34,63.5 39.37,63.5 | 41.34,63.5 41.34,64.57
  Top 0.406: JP43.GND1 111.55,63.53 111.76,63.74
  other vias: 135.89,62.23 135.89,66.04 135.89,58.42 100.33,54.61 77.47,54.61 54.61,54.61 31.75,54.61 8.89,54.61 123.19,54.61
  pour Top (isolate 0.305): 7.62,71.12 27.94,71.12 27.94,53.34 7.62,53.34
  pour Top (isolate 0.305): 30.48,71.12 50.8,71.12 50.8,53.34 30.48,53.34
  pour Top (isolate 0.305, no thermals): 53.34,71.12 65.41,71.12 65.41,53.34 53.34,53.34
  pour Top (isolate 0.305): 76.2,71.12 96.52,71.12 96.52,53.34 76.2,53.34
  pour Top (isolate 0.305): 99.06,71.12 119.38,71.12 119.38,53.34 110.85,53.34 110.85,64.77 102.87,64.77 102.87,53.34 99.06,53.34
  pour Top (isolate 0.305): 106.68,57.15 107.95,58.42 110.97,58.42 110.97,53.34 102.87,53.34 102.87,57.15
  pour Bottom (isolate 0.305): 121.92,71.12 142.24,71.12 142.24,53.34 121.92,53.34
  pour Bottom (isolate 0.305): 99.06,71.12 119.38,71.12 119.38,53.34 99.06,53.34
  pour Bottom (isolate 0.305): 76.2,71.12 96.52,71.12 96.52,53.34 76.2,53.34
  pour Bottom (isolate 0.305): 53.34,71.12 73.66,71.12 73.66,53.34 53.34,53.34
  pour Bottom (isolate 0.305): 30.48,71.12 50.8,71.12 50.8,53.34 30.48,53.34
  pour Bottom (isolate 0.305): 7.62,71.12 27.94,71.12 27.94,53.34 7.62,53.34
GND4  (via drill 0.25)  (8 unrouted)
  Top 0.254: JP53.GND1 85.06,39.4 83.82,40.64 83.82,41.91 82.55,43.18 JP54.1 | 109.42,39.41 109.43,39.4 JP55.GND1 109.41,39.4 109.4,39.41 111.2,39.41 | JP57.GND1 130.78,39.4 129.54,40.64 129.54,41.91 128.27,43.18 JP58.1
  Top 0.356: JP59.GND1 41.7,39.37 41.34,39.37 | 41.34,39.37 39.37,39.37 | 41.34,39.37 41.34,40.44
  Top 0.406: JP55.GND1 111.55,39.4 111.76,39.61
  other vias: 135.89,38.1 135.89,41.91 135.89,34.29 100.33,30.48 77.47,30.48 54.61,30.48 31.75,30.48 8.89,30.48 123.19,30.48
  pour Top (isolate 0.305): 7.62,46.99 27.94,46.99 27.94,29.21 7.62,29.21
  pour Top (isolate 0.305): 30.48,46.99 50.8,46.99 50.8,29.21 30.48,29.21
  pour Top (isolate 0.305, no thermals): 53.34,46.99 65.41,46.99 65.41,29.21 53.34,29.21
  pour Top (isolate 0.305): 76.2,46.99 96.52,46.99 96.52,29.21 76.2,29.21
  pour Top (isolate 0.305): 99.06,46.99 119.38,46.99 119.38,29.21 110.85,29.21 110.85,40.64 102.87,40.64 102.87,29.21 99.06,29.21
  pour Top (isolate 0.305): 106.68,33.02 107.95,34.29 110.97,34.29 110.97,29.21 102.87,29.21 102.87,33.02
  pour Bottom (isolate 0.305): 121.92,46.99 142.24,46.99 142.24,29.21 121.92,29.21
  pour Bottom (isolate 0.305): 99.06,46.99 119.38,46.99 119.38,29.21 99.06,29.21
  pour Bottom (isolate 0.305): 76.2,46.99 96.52,46.99 96.52,29.21 76.2,29.21
  pour Bottom (isolate 0.305): 53.34,46.99 73.66,46.99 73.66,29.21 53.34,29.21
  pour Bottom (isolate 0.305): 30.48,46.99 50.8,46.99 50.8,29.21 30.48,29.21
  pour Bottom (isolate 0.305): 7.62,46.99 27.94,46.99 27.94,29.21 7.62,29.21
GND5  (via drill 0.25)  (8 unrouted)
  Top 0.254: JP65.GND1 85.06,15.27 83.82,16.51 83.82,17.78 82.55,19.05 JP66.1 | 109.42,15.28 109.43,15.27 JP67.GND1 109.41,15.27 109.4,15.28 111.2,15.28 | JP69.GND1 130.78,15.27 129.54,16.51 129.54,17.78 128.27,19.05 JP70.1
  Top 0.356: JP71.GND1 41.7,15.24 41.34,15.24 | 41.34,15.24 39.37,15.24 | 41.34,15.24 41.34,16.31
  Top 0.406: JP67.GND1 111.55,15.27 111.76,15.48
  other vias: 135.89,13.97 135.89,17.78 135.89,10.16 100.33,6.35 77.47,6.35 54.61,6.35 31.75,6.35 8.89,6.35 123.19,6.35
  pour Top (isolate 0.305): 7.62,22.86 27.94,22.86 27.94,5.08 7.62,5.08
  pour Top (isolate 0.305): 30.48,22.86 50.8,22.86 50.8,5.08 30.48,5.08
  pour Top (isolate 0.305, no thermals): 53.34,22.86 65.41,22.86 65.41,5.08 53.34,5.08
  pour Top (isolate 0.305): 76.2,22.86 96.52,22.86 96.52,5.08 76.2,5.08
  pour Top (isolate 0.305): 99.06,22.86 119.38,22.86 119.38,5.08 110.85,5.08 110.85,16.51 102.87,16.51 102.87,5.08 99.06,5.08
  pour Top (isolate 0.305): 106.68,8.89 107.95,10.16 110.97,10.16 110.97,5.08 102.87,5.08 102.87,8.89
  pour Bottom (isolate 0.305): 121.92,22.86 142.24,22.86 142.24,5.08 121.92,5.08
  pour Bottom (isolate 0.305): 99.06,22.86 119.38,22.86 119.38,5.08 99.06,5.08
  pour Bottom (isolate 0.305): 76.2,22.86 96.52,22.86 96.52,5.08 76.2,5.08
  pour Bottom (isolate 0.305): 53.34,22.86 73.66,22.86 73.66,5.08 53.34,5.08
  pour Bottom (isolate 0.305): 30.48,22.86 50.8,22.86 50.8,5.08 30.48,5.08
  pour Bottom (isolate 0.305): 7.62,22.86 27.94,22.86 27.94,5.08 7.62,5.08
N$1
  Top 0.406: JP1.GND1 16.48,135.92 15.24,137.16 15.24,138.43 13.97,139.7 JP2.1
N$2
  Top 0.406: JP1.ID1 15.86,135.27 13.97,137.16 JP2.2
N$3
  Top 0.406: JP1.D+1 JP2.3
N$4
  Top 0.406: JP1.D-1 15.86,133.97 13.97,132.08 JP2.4
N$5
  Top 0.406: JP1.VBUS1 16.48,133.32 15.24,132.08 15.24,130.81 13.97,129.54 JP2.5
N$6
  Top 0.254: 109.42,135.28 111.12,135.28
N$7
  Top 0.406: JP3.GND1 16.48,111.79 15.24,113.03 15.24,114.3 13.97,115.57 JP5.1
N$8
  Top 0.406: JP3.ID1 15.86,111.14 13.97,113.03 JP5.2
N$9
  Top 0.254: JP7.ID1 84.44,135.27 82.55,137.16 JP8.2
N$10
  Top 0.356: JP4.5 36.83,129.54 38.1,130.81 38.1,132.08 39.34,133.32 JP13.VBUS1
N$11
  Top 0.254: JP7.D+1 JP8.3
N$12
  Top 0.254: JP7.D-1 84.44,133.97 82.55,132.08 JP8.4
N$13
  Top 0.254: JP7.VBUS1 86.29,133.32 86.28,133.31
  Top 0.61: 86.28,133.31 85.05,133.31 83.82,132.08 83.82,130.81 82.55,129.54 JP8.5
N$14
  Top 0.406: JP3.D+1 JP5.3
N$15
  Top 0.406: JP3.D-1 15.86,109.84 13.97,107.95 JP5.4
N$16
  Top 0.203: 109.44,134.62 JP10.3
  Top 0.254: 109.44,134.62 JP9.D+1 111.12,134.62
N$17
  Top 0.203: JP9.D-1 108.57,133.97 106.68,132.08 JP10.4
  Top 0.254: JP9.D-1 109.44,133.97 111.12,133.97
N$18
  Top 0.203: JP9.VBUS1 109.19,133.32 107.95,132.08 107.95,130.81 106.68,129.54 JP10.5
  Top 0.254: JP9.VBUS1 109.43,133.32 109.42,133.31 111.12,133.31
N$19
  Top 0.406: JP3.VBUS1 16.48,109.19 15.24,107.95 15.24,106.68 13.97,105.41 JP5.5
N$20
  Top 0.356: JP15.5 36.83,105.41 38.1,106.68 38.1,107.95 39.34,109.19 JP23.VBUS1
N$21
  Top 0.254: JP11.D+1 JP12.3
N$22
  Top 0.254: JP11.D-1 130.16,133.97 128.27,132.08 JP12.4
N$23
  Top 0.254: JP11.VBUS1 131.87,133.32 131.29,132.74
  Top 0.762: 131.29,132.74 130.19,132.74 127,129.54 JP12.5
N$24
  Top 0.254: JP17.ID1 84.44,111.14 82.55,113.03 JP18.2
N$25
  Top 0.254: JP17.D+1 JP18.3
N$26
  Top 0.254: JP17.D-1 84.44,109.84 82.55,107.95 JP18.4
N$27
  Top 0.254: JP17.VBUS1 86.29,109.19 86.28,109.18
  Top 0.61: 86.28,109.18 85.05,109.18 83.82,107.95 83.82,106.68 82.55,105.41 JP18.5
N$28
  Top 0.203: 109.44,110.49 JP20.3
  Top 0.254: 109.44,110.49 JP19.D+1 111.12,110.49
N$29
  Top 0.203: JP19.D-1 108.57,109.84 106.68,107.95 JP20.4
  Top 0.254: JP19.D-1 109.44,109.84 109.44,109.83 111.12,109.83
N$30
  Top 0.203: JP19.VBUS1 109.19,109.19 107.95,107.95 107.95,106.68 106.68,105.41 JP20.5
  Top 0.254: JP19.VBUS1 109.43,109.19 109.42,109.18 111.12,109.18
N$31
  Top 0.254: JP21.D+1 JP22.3
N$32
  Top 0.254: JP21.D-1 130.16,109.84 128.27,107.95 JP22.4
N$33
  Top 0.254: JP21.VBUS1 131.87,109.19 131.29,108.61
  Top 0.762: 131.29,108.61 130.19,108.61 127,105.41 JP22.5
N$34
  Top 0.254: 109.42,111.14 111.12,111.14
N$35
  Top 0.406: JP25.GND1 16.48,87.66 15.24,88.9 15.24,90.17 13.97,91.44 JP26.1
N$36
  Top 0.406: JP25.ID1 15.86,87.01 13.97,88.9 JP26.2
N$37
  Top 0.406: JP25.D+1 JP26.3
N$38
  Top 0.406: JP25.D-1 15.86,85.71 13.97,83.82 JP26.4
N$39
  Top 0.406: JP25.VBUS1 16.48,85.06 15.24,83.82 15.24,82.55 13.97,81.28 JP26.5
N$40
  Top 0.356: JP27.5 36.83,81.28 38.1,82.55 38.1,83.82 39.34,85.06 JP35.VBUS1
N$41
  Top 0.254: JP29.ID1 84.44,87.01 82.55,88.9 JP30.2
N$42
  Top 0.254: JP29.D+1 JP30.3
N$43
  Top 0.254: JP29.D-1 84.44,85.71 82.55,83.82 JP30.4
N$44
  Top 0.254: JP29.VBUS1 86.29,85.06 86.28,85.05
  Top 0.61: 86.28,85.05 85.05,85.05 83.82,83.82 83.82,82.55 82.55,81.28 JP30.5
N$45
  Top 0.203: 109.44,86.36 JP32.3
  Top 0.254: 109.44,86.36 JP31.D+1 111.12,86.36
N$46
  Top 0.203: JP31.D-1 108.57,85.71 106.68,83.82 JP32.4
  Top 0.254: JP31.D-1 109.44,85.71 109.44,85.7 111.12,85.7
N$47
  Top 0.203: JP31.VBUS1 109.19,85.06 107.95,83.82 107.95,82.55 106.68,81.28 JP32.5
  Top 0.254: JP31.VBUS1 109.43,85.06 109.42,85.05 111.12,85.05
N$48
  Top 0.254: JP33.D+1 JP34.3
N$49
  Top 0.254: JP33.D-1 130.16,85.71 128.27,83.82 JP34.4
N$50
  Top 0.254: JP33.VBUS1 131.87,85.06 131.29,84.47
  Top 0.762: 131.29,84.47 130.19,84.47 127,81.28 JP34.5
N$51
  Top 0.254: 109.42,87.02 111.12,87.02
N$52
  Top 0.406: JP37.GND1 16.48,63.53 15.24,64.77 15.24,66.04 13.97,67.31 JP38.1
N$53
  Top 0.406: JP37.ID1 15.86,62.88 13.97,64.77 JP38.2
N$54
  Top 0.406: JP37.D+1 JP38.3
N$55
  Top 0.406: JP37.D-1 15.86,61.58 13.97,59.69 JP38.4
N$56
  Top 0.406: JP37.VBUS1 16.48,60.93 15.24,59.69 15.24,58.42 13.97,57.15 JP38.5
N$57
  Top 0.356: JP39.5 36.83,57.15 38.1,58.42 38.1,59.69 39.34,60.93 JP47.VBUS1
N$58
  Top 0.254: JP41.ID1 84.44,62.88 82.55,64.77 JP42.2
N$59
  Top 0.254: JP41.D+1 JP42.3
N$60
  Top 0.254: JP41.D-1 84.44,61.58 82.55,59.69 JP42.4
N$61
  Top 0.254: JP41.VBUS1 86.29,60.93 86.28,60.92
  Top 0.61: 86.28,60.92 85.05,60.92 83.82,59.69 83.82,58.42 82.55,57.15 JP42.5
N$62
  Top 0.203: 109.44,62.23 JP44.3
  Top 0.254: 109.44,62.23 JP43.D+1 111.12,62.23
N$63
  Top 0.203: JP43.D-1 108.57,61.58 106.68,59.69 JP44.4
  Top 0.254: JP43.D-1 109.44,61.58 111.12,61.58
N$64
  Top 0.203: JP43.VBUS1 109.19,60.93 107.95,59.69 107.95,58.42 106.68,57.15 JP44.5
  Top 0.254: JP43.VBUS1 109.43,60.93 109.42,60.92 111.12,60.92
N$65
  Top 0.254: JP45.D+1 JP46.3
N$66
  Top 0.254: JP45.D-1 130.16,61.58 128.27,59.69 JP46.4
N$67
  Top 0.254: JP45.VBUS1 131.87,60.93 131.29,60.34
  Top 0.762: 131.29,60.34 130.19,60.34 127,57.15 JP46.5
N$68
  Top 0.254: 109.42,62.88 111.12,62.88
N$69
  Top 0.406: JP49.GND1 16.48,39.4 15.24,40.64 15.24,41.91 13.97,43.18 JP50.1
N$70
  Top 0.406: JP49.ID1 15.86,38.75 13.97,40.64 JP50.2
N$71
  Top 0.406: JP49.D+1 JP50.3
N$72
  Top 0.406: JP49.D-1 15.86,37.45 13.97,35.56 JP50.4
N$73
  Top 0.406: JP49.VBUS1 16.48,36.8 15.24,35.56 15.24,34.29 13.97,33.02 JP50.5
N$74
  Top 0.356: JP51.5 36.83,33.02 38.1,34.29 38.1,35.56 39.34,36.8 JP59.VBUS1
N$75
  Top 0.254: JP53.ID1 84.44,38.75 82.55,40.64 JP54.2
N$76
  Top 0.254: JP53.D+1 JP54.3
N$77
  Top 0.254: JP53.D-1 84.44,37.45 82.55,35.56 JP54.4
N$78
  Top 0.254: JP53.VBUS1 86.29,36.8 86.28,36.79
  Top 0.61: 86.28,36.79 85.05,36.79 83.82,35.56 83.82,34.29 82.55,33.02 JP54.5
N$79
  Top 0.203: 109.44,38.1 JP56.3
  Top 0.254: 109.44,38.1 JP55.D+1 111.12,38.1
N$80
  Top 0.203: JP55.D-1 108.57,37.45 106.68,35.56 JP56.4
  Top 0.254: JP55.D-1 109.44,37.45 111.12,37.45
N$81
  Top 0.203: JP55.VBUS1 109.19,36.8 107.95,35.56 107.95,34.29 106.68,33.02 JP56.5
  Top 0.254: JP55.VBUS1 109.43,36.8 109.42,36.79 111.12,36.79
N$82
  Top 0.254: JP57.D+1 JP58.3
N$83
  Top 0.254: JP57.D-1 130.16,37.45 128.27,35.56 JP58.4
N$84
  Top 0.254: JP57.VBUS1 131.87,36.8 131.29,36.22
  Top 0.762: 131.29,36.22 130.19,36.22 127,33.02 JP58.5
N$85
  Top 0.254: 109.42,38.76 111.12,38.76
N$86
  Top 0.406: JP61.GND1 16.48,15.27 15.24,16.51 15.24,17.78 13.97,19.05 JP62.1
N$87
  Top 0.406: JP61.ID1 15.86,14.62 13.97,16.51 JP62.2
N$88
  Top 0.406: JP61.D+1 JP62.3
N$89
  Top 0.406: JP61.D-1 15.86,13.32 13.97,11.43 JP62.4
N$90
  Top 0.406: JP61.VBUS1 16.48,12.67 15.24,11.43 15.24,10.16 13.97,8.89 JP62.5
N$91
  Top 0.356: JP63.5 36.83,8.89 38.1,10.16 38.1,11.43 39.34,12.67 JP71.VBUS1
N$92
  Top 0.254: JP65.ID1 84.44,14.62 82.55,16.51 JP66.2
N$93
  Top 0.254: JP65.D+1 JP66.3
N$94
  Top 0.254: JP65.D-1 84.44,13.32 82.55,11.43 JP66.4
N$95
  Top 0.254: JP65.VBUS1 86.29,12.67 86.28,12.66
  Top 0.61: 86.28,12.66 85.05,12.66 83.82,11.43 83.82,10.16 82.55,8.89 JP66.5
N$96
  Top 0.203: 109.44,13.97 JP68.3
  Top 0.254: 109.44,13.97 JP67.D+1 111.12,13.97
N$97
  Top 0.203: JP67.D-1 108.57,13.32 106.68,11.43 JP68.4
  Top 0.254: JP67.D-1 109.44,13.32 109.44,13.31 111.12,13.31
N$98
  Top 0.203: JP67.VBUS1 109.19,12.67 107.95,11.43 107.95,10.16 106.68,8.89 JP68.5
  Top 0.254: JP67.VBUS1 109.43,12.67 109.42,12.66 111.12,12.66
N$99
  Top 0.254: JP69.D+1 JP70.3
N$100
  Top 0.254: JP69.D-1 130.16,13.32 128.27,11.43 JP70.4
N$101
  Top 0.254: JP69.VBUS1 131.87,12.67 131.29,12.09
  Top 0.762: 131.29,12.09 130.19,12.09 127,8.89 JP70.5
N$102
  Top 0.254: 109.42,14.62 111.12,14.62

## Text on the board
Dimension: Route Out | Route Out | Route Out | Route Out | Route Out | Route Out | Route Out | Route Out | Route Out | Route Out | Route Out | Route Out | Route Out | Route Out | Route Out | Route Out | Route Out | Route Out | Route Out | Route Out | Route Out | Route Out | Route Out | Route Out | Route Out | Route Out | Route Out | Route Out | Route Out | Route Out | Route Out | Route Out | Route Out | Route Out | Route Out | Route Out
tPlace: Stock | Stubs | Paste01 | Paste02 | Boss01 | Boss02